# EAGLE board Callisto_Limit_Switch_PX (EAGLE 9.6.2)
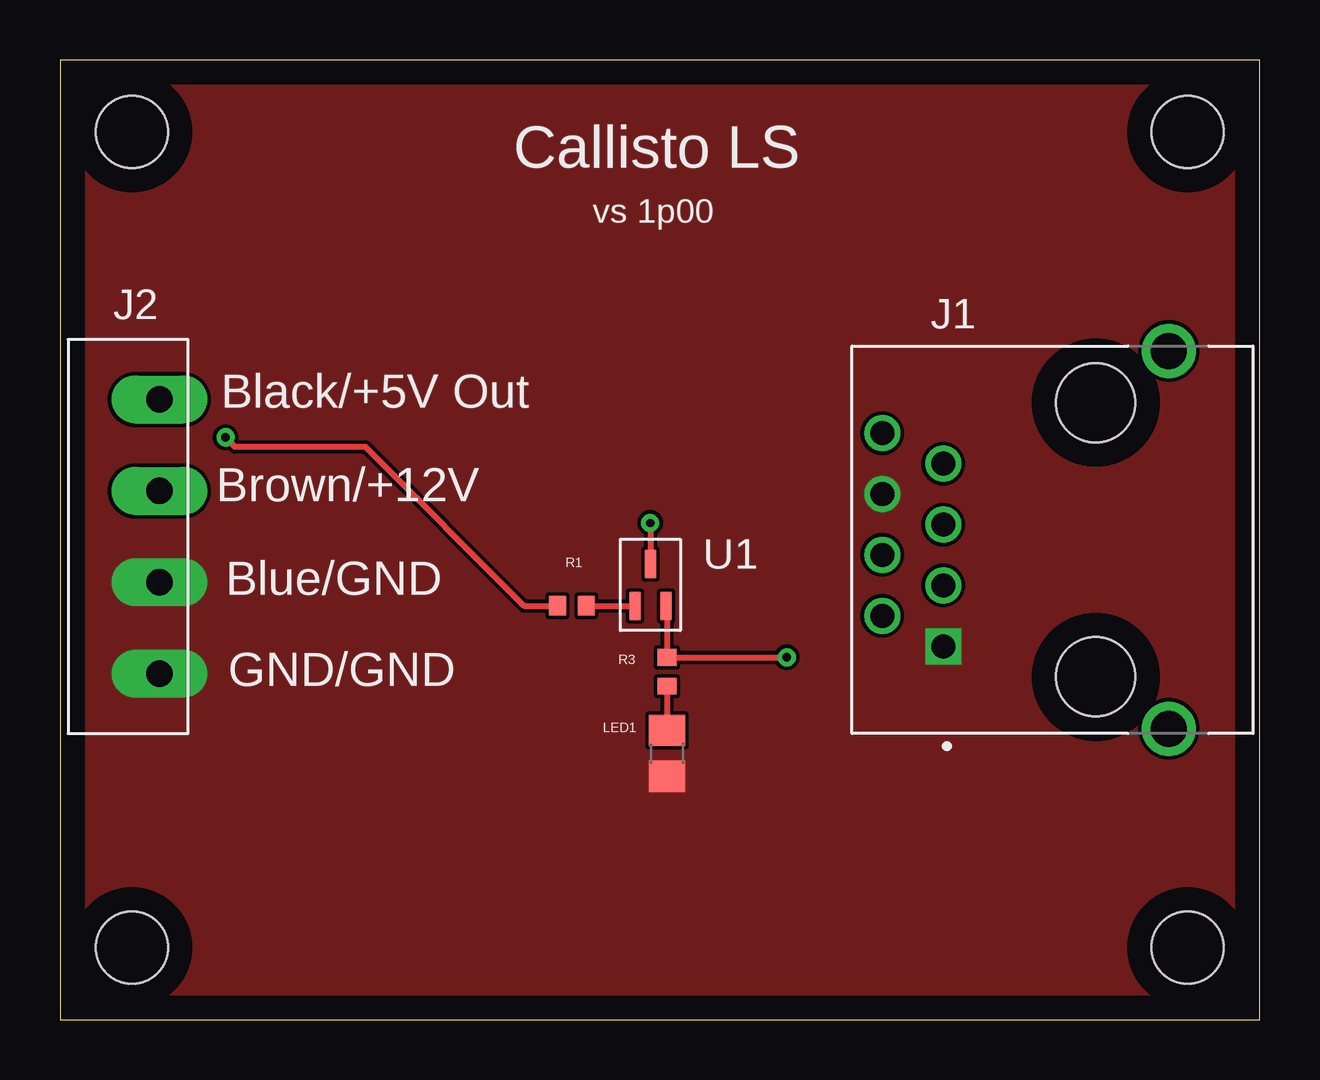
[diagram p0: board, top side]
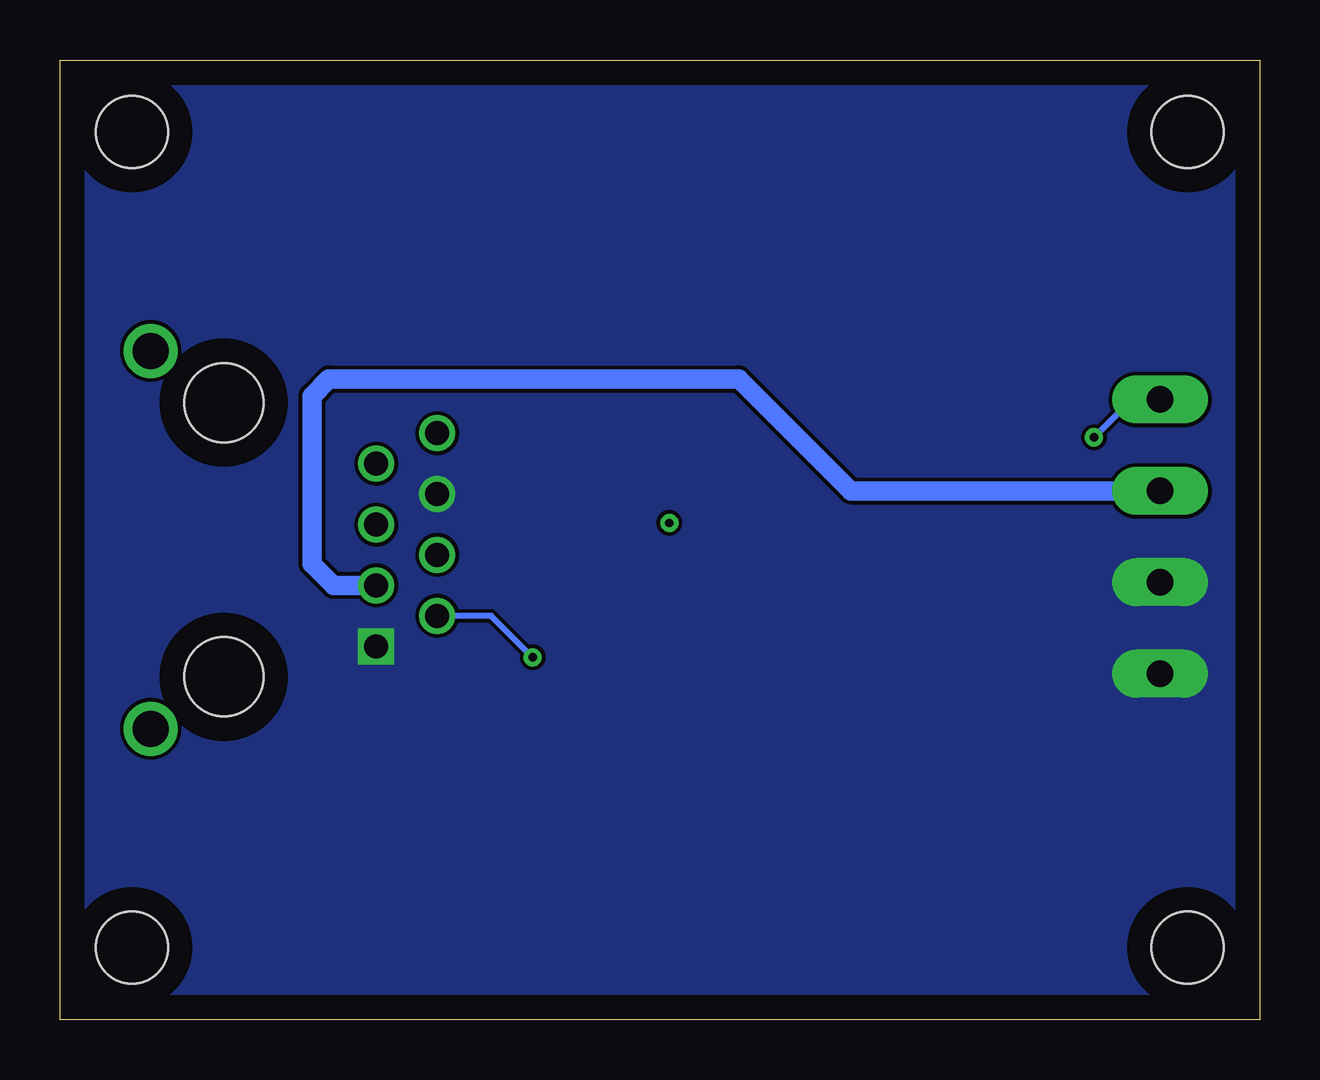
[diagram p1: board, bottom side, seen from below]

Size 50 x 40 mm. Coordinates in mm from the lower left corner, seen from the top.
Outline: 0,0 50,0 50,40 0,40 0,0
Copper layers (1*16): Top 0.035mm / dielectric 1.5mm / Bottom 0.035mm
Design rules "default": minimum track width 6mil, minimum drill 0.35mm, track to track 6mil, track to pad 6mil, pad to pad 6mil, via to via 6mil, smd to smd 6mil, copper to edge 40mil, drill to drill 6mil, minimum pad ring 10mil, minimum via ring 8mil, stop-mask expansion 4mil, vias tented up to drill 0mil, thermal gap 10mil
Holes 3 mm at 3,3 47,3 3,37 47,37

## Footprints (pad centres in the part's own frame; a part is rotated, then mirrored left to right if it is on the bottom)
ASSMANN_A-2014-2S-4-N-R = drill 1 square: 1 4.445,-6.35 | drill 1: 2 3.175,-8.89; 3 1.905,-6.35; 4 0.635,-8.89; 5 -0.635,-6.35; 6 -1.905,-8.89; 7 -3.175,-6.35; 8 -4.445,-8.89 | drill 1.5: S1 -7.875,3.05; S2 7.875,3.05 | hole 3.3: -5.715,0; 5.715,0
1X4_3.81MM_PITCH = drill 1.1 pad 2 long: P$1 0,0; P$2 3.81,0; P$3 7.62,0; P$4 11.43,0
0805 = smd 1.3 x 1.5: 1 -0.95,0; 2 0.95,0
0402 = smd 0.8 x 0.7: P$1 0,0.6; P$2 0,-0.6
SOT323 = smd 0.457 x 1.168: 1 -0.65,-0.876; 2 0.65,-0.876; 3 0,0.876

## Placement (x,y rotation side)
J1  RJ45_TH_VERT  [ASSMANN_A-2014-2S-4-N-R]  43.17,20 270 top
J2  4-pos  [1X4_3.81MM_PITCH]  4.14,25.85 270 top
LED1  Green  [0805]  25.3,11.1 270 top
R1  2.2K  [0402]  21.34,17.25 90 top
R3  470R0  [0402]  25.3,14.5 180 top
U1  NPN  [SOT323]  24.61,18.12 0 top

## Library data of the parts
J1 = 3D_MIG_Controller; DESCRIPTION: Jack Modular Connector 8p8c (RJ45, Ethernet) Vertical Shielded; DIGI-KEY_PART_NUMBER: AE10399-ND; MF: Assmann WSW Components; MP: A-2014-2S-4-N-R; PACKAGE: None
J2 = 3D_MIG_Controller; PARTNO: 691322310004
LED1 = 3D_MIG_Controller; PARTNO: LG R971-KN-1
R1 = 3D_MIG_Controller
R3 = 3D_MIG_Controller; PARTNO: RMCF0402JT470R
U1 = 3D_MIG_Controller; PARTNO: BC846BW_NPN

## Nets
1_LS: J1.2 R3.P$2 U1.2
BLACK: J2.P$1 R1.P$1
GND: J1.1 J1.6 J2.P$3 J2.P$4 LED1.2
N$1: R1.P$2 U1.1
N$2: LED1.1 R3.P$1
VDD: U1.3
VDD12: J1.3 J2.P$2
VDD-12: J1.7

## Tracks (layer width: path | path; a pad name or v marks a point on that pad's centre or on a via)
1_LS  (via drill 0.35)
  Top 0.254: U1.2 25.3,17.2 R3.P$2 v30.3,15.1
  Bottom 0.254: v30.3,15.1 32.02,16.82 J1.2
BLACK  (via drill 0.35)
  Top 0.254: v6.9,24.27 7.3,23.87 12.73,23.87 19.35,17.25 R1.P$1
  Bottom 0.254: v6.9,24.27 5.32,25.85 J2.P$1
GND
  pour Bottom (no thermals): 0,40 50,40 50,0 0,0
  pour Top (no thermals): 0,40 50,40 50,0 0,0
N$1
  Top 0.254: R1.P$2 U1.1
N$2
  Top 0.254: R3.P$1 LED1.1
VDD  (via drill 0.35)
  Top 0.254: v24.6,20.7 v24.61,20.69 U1.3
  Bottom 0.254: 24.66,20.64 v24.6,20.7
VDD12
  Bottom 0.813: J1.3 38.59,18.09 39.5,19 39.5,26 38.8,26.7 21.7,26.7 17.04,22.04 J2.P$2

## Text on the board
tPlace: Callisto LS | vs 1p00 | Black/+5V Out | Brown/+12V | Blue/GND | GND/GND